# Altium PCB uChord Strum.PcbDoc
Units mm, origin at the board's own origin, x right, y up, seen from the top; angles counter-clockwise.
Board outline 285 x 94.6 mm, 2 copper layers (Top Layer, Bottom Layer), stack 1.577 mm thick; 1 components, 0 nets, 17 pads, 0 vias.
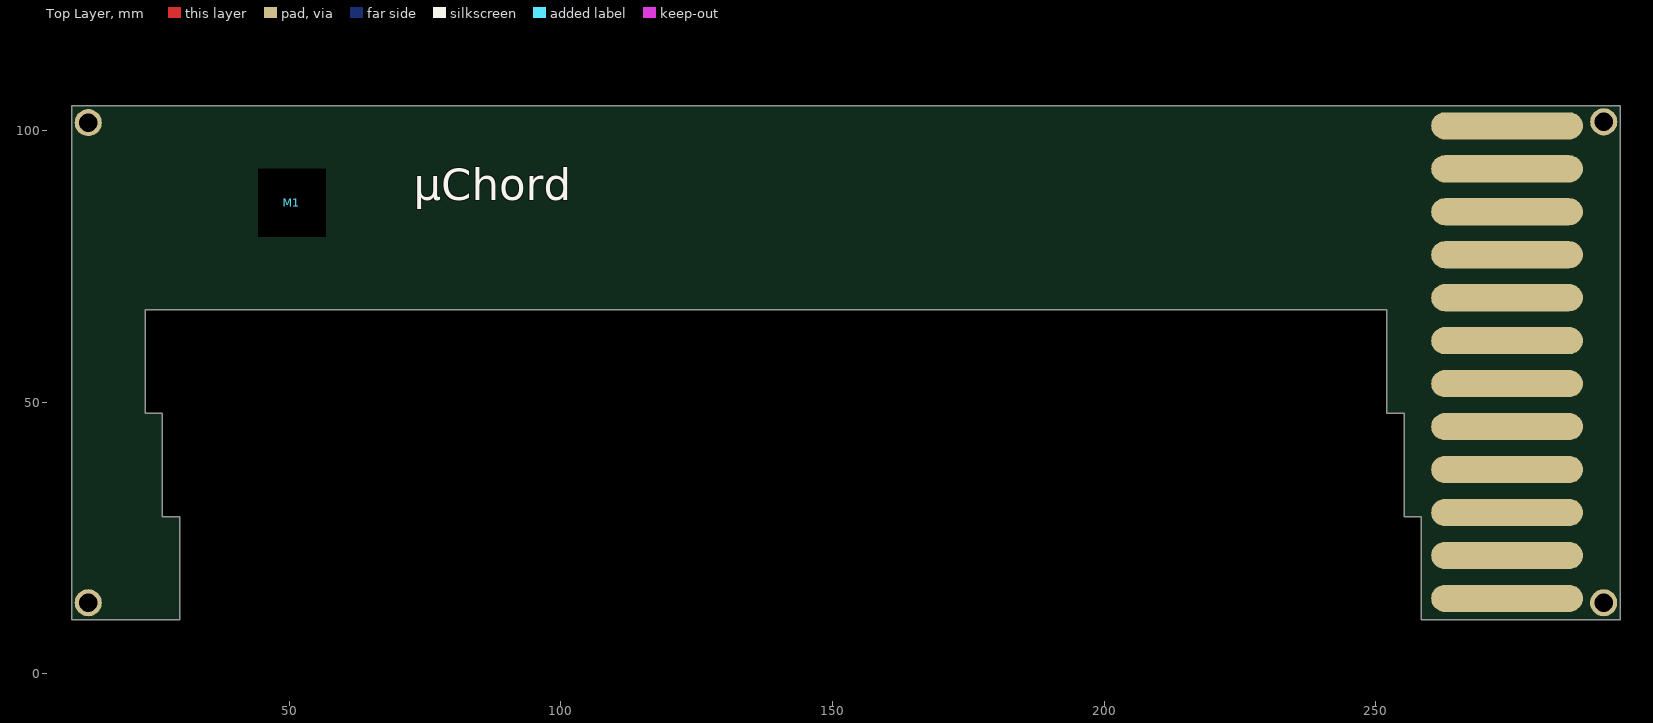
[diagram p0: Top Layer view]
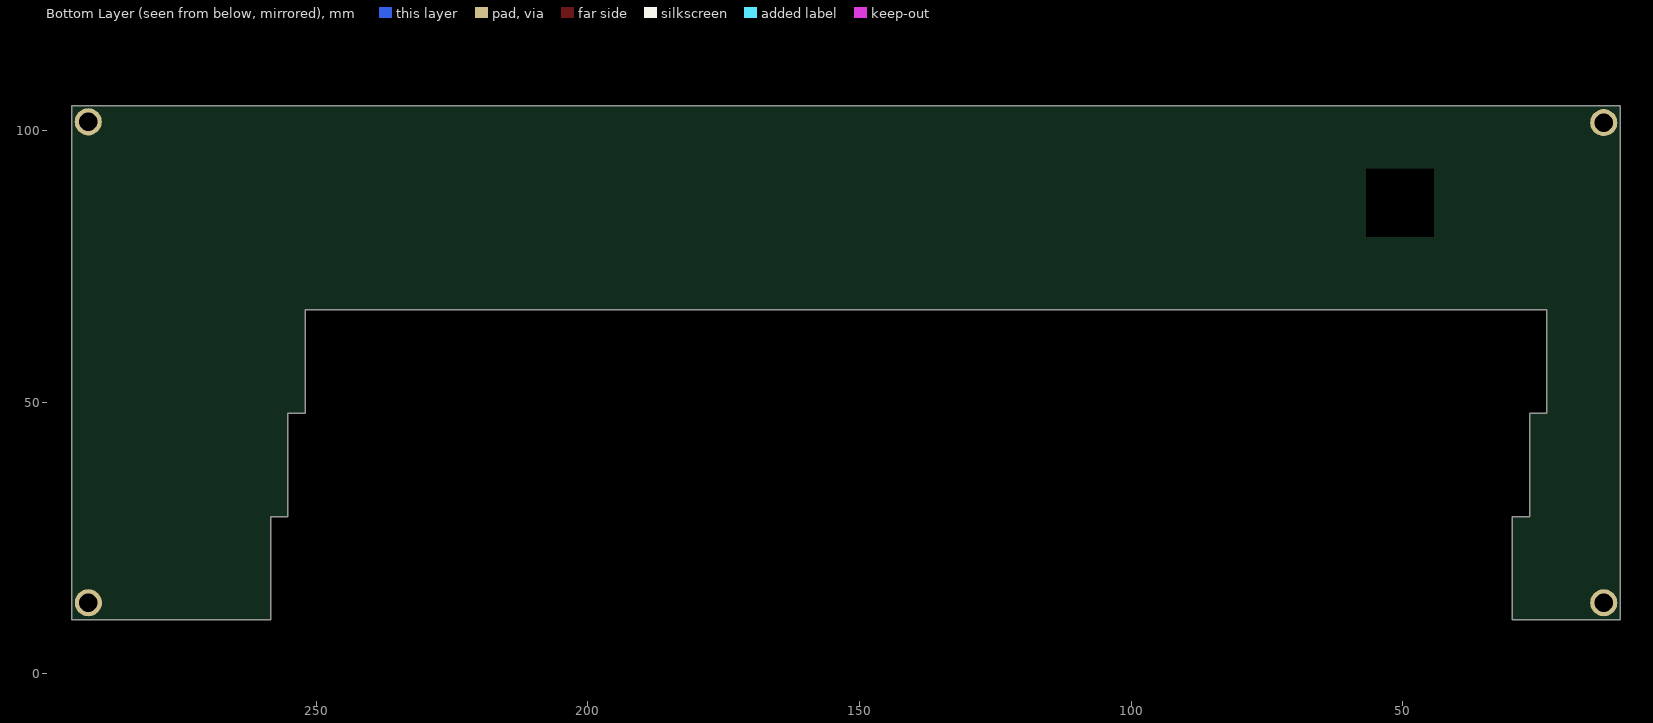
[diagram p1: Bottom Layer view, seen from below]

## Layer stack, top to bottom
Top Solder: solder mask 0.0102, Solder Resist, Dk 3.5
Top Layer: signal copper 0.0356
Dielectric 1: dielectric 1.5059, FR-4, Dk 4.8
Bottom Layer: signal copper 0.0356
Bottom Solder: solder mask 0.0102, Solder Resist, Dk 3.5

## Board outline
26.638,28.925 26.638,47.975 23.463,47.975 23.463,67.025 252.063,67.025 252.063,47.975 255.238,47.975 255.238,28.925 258.413,28.925 258.413,10 295,10 295,104.588 294.988,104.6 10,104.6 10,10 29.813,10 29.813,28.925

## Design rules (kind name [scope] priority, off if disabled: settings)
Clearance [All] p1: gap=0.254 ignorepadtopadclearanceinfootprint=FALSE except(0: Arc-Hole Track-Hole SMDPad-Hole THPad-Hole Via-Hole Fill-Hole Poly-Hole Region-Hole Text-Hole)
PolygonConnect [All] p1: connectstyle=Relief reliefconductorwidth=0.254 reliefentries=4 polygonreliefangle="90 Angle" airgapwidth=0.254
RoutingVias [All] p1: holewidth=0.711 width=1.27 viastyle="Through Hole" minholewidth=0.711 minwidth=1.27 maxholewidth=0.711 maxwidth=1.27
SolderMaskExpansion [All] p1: expansion=0.102 istentingtop=FALSE
Width [All] p1: maxlimit=0.254 minlimit=0.254 preferedwidth=0.254
30 further rules are at their usual default settings.

## Components (designator, comment, footprint, x,y, rotation, side; value= is the part's Value field where it differs from the comment)
M1 "" OLEDP96MOD_HOLE 50.5,86.75 r0 top locked

## Footprints (in the part's own frame and the unit in brackets; to place one, negate y for a bottom-side part, rotate by r counter-clockwise, add the part's x,y. Pads: shape width x height; smd on the part's side, far side on the other; paste and mask are expansions set on the pad)
OLEDP96MOD_HOLE [mil]
  round 60 hole 492.13 square unplated: 0(0,0)

## Part data
M1: library part OLEDp96MOD_HOLE, "p95_OLED_MODULE_HOLE", Manufacturer Part Number=OLEDp96MOD_HOLE, PartNumber=OLEDp96MOD_HOLE

## Free pads (board coordinates)
  round 5 hole 3.4: 8(13,13.1) 8(13,101.5) 8(291.988,13.1) 8(292,101.65)
  oval 27.94x5 smd: 8(274.2,13.9) 8(274.2,21.809) 8(274.2,29.718) 8(274.2,37.627) 8(274.2,45.536) 8(274.2,53.445) 8(274.2,61.355) 8(274.2,69.264) 8(274.2,77.173) 8(274.2,85.082) 8(274.2,92.991) 8(274.2,100.9)

## Nets (pads, with @x,y where several pads share a name; then routed paths per layer and width w, separated by ;. In a path a pad name is that pad's centre, name@x,y a point inside that pad or via, vN(x,y) a via of type N, cw(c..) or ccw(c..) an arc to the next point about the centre after c; other vN are vias at no path point)
pads on no net: M1.0

## Silkscreen, mask and mechanical layers (free items; w line width, h text height)
Top Overlay:
  text "µChord" at 72.9,85.261 h10
Mechanical 1:
  the board outline again, w0.2